# Altium PCB NODEMCU_DEVKIT_V1.0.PcbDoc
Units mm, origin at the board's own origin, x right, y up, seen from the top; angles counter-clockwise.
Board outline 25.4 x 48.26 mm, 2 copper layers (Top Layer, Bottom Layer); 34 components, 41 nets, 160 pads, 243 vias.
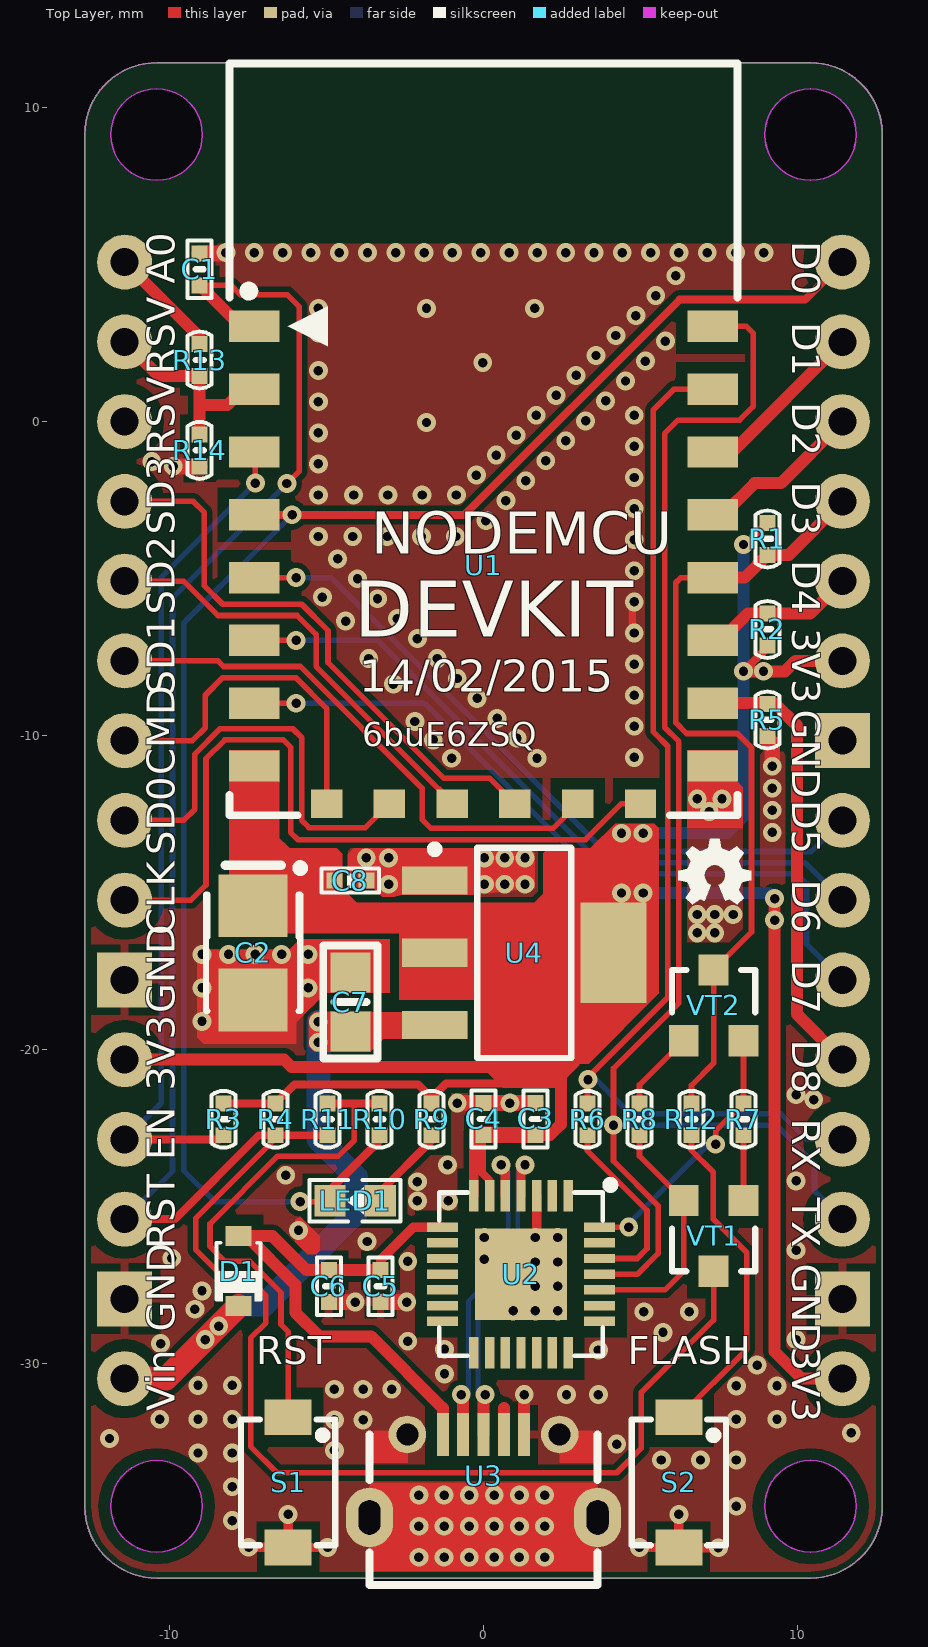
[diagram p0: Top Layer view]
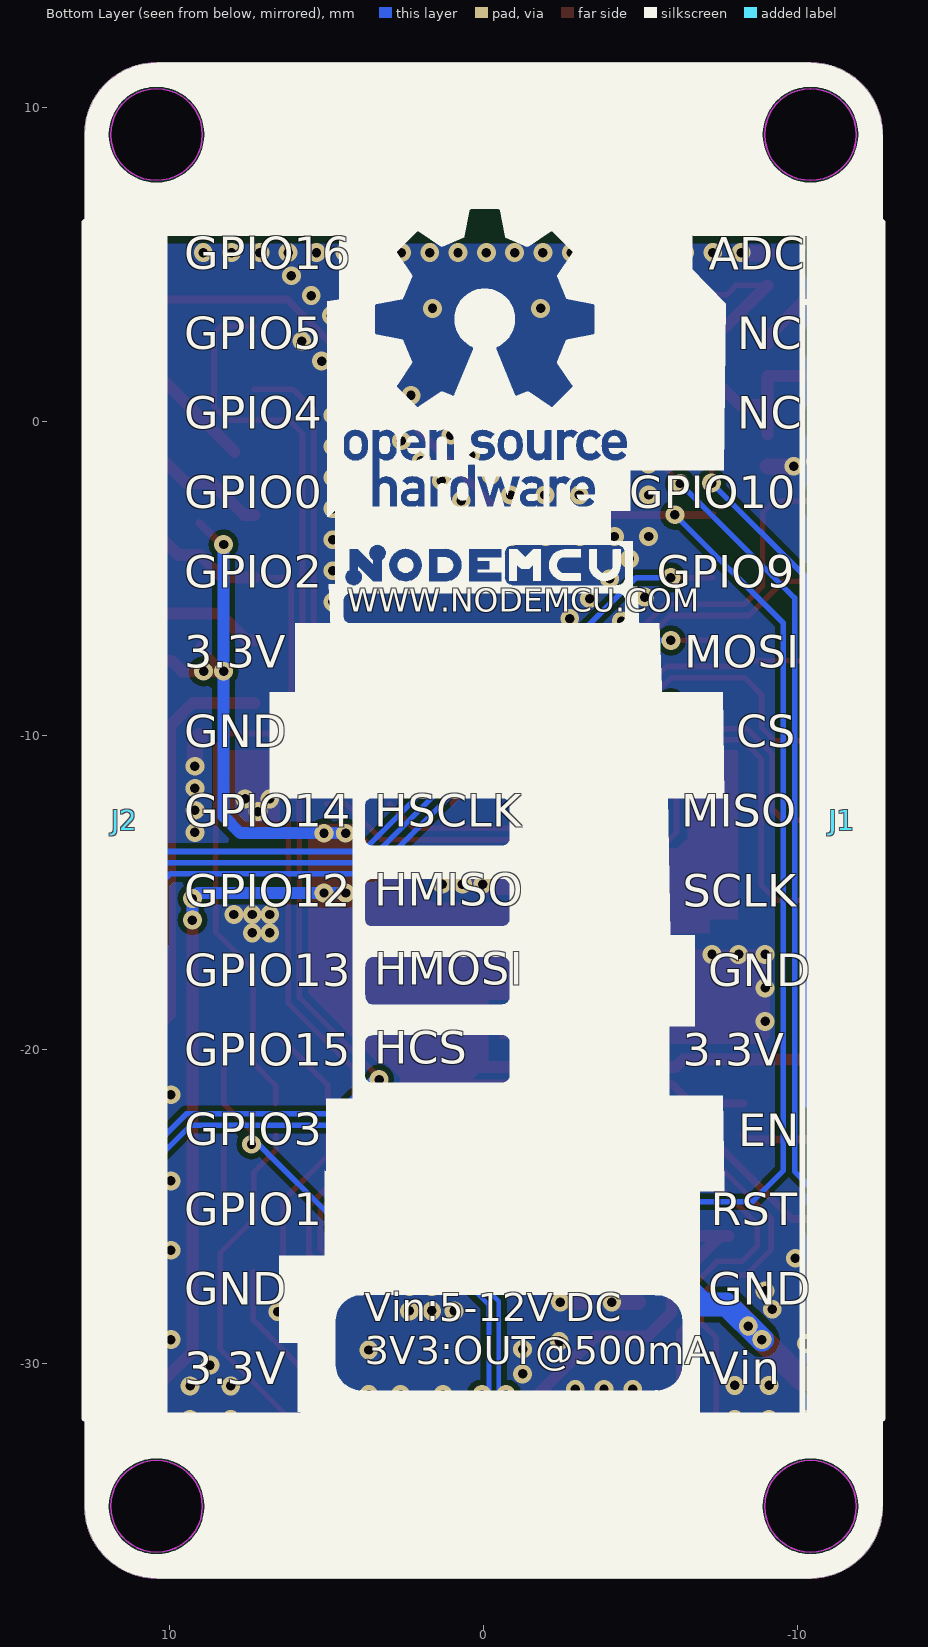
[diagram p1: Bottom Layer view, seen from below]

## Layer stack, top to bottom
Top Solder: solder mask 0.0102, Solder Resist, Dk 3.5
Top Layer: signal copper 0.0356
Dielectric 1: dielectric 0.32, FR-4, Dk 4.8
Bottom Layer: signal copper 0.0356
Bottom Solder: solder mask 0.0102, Solder Resist, Dk 3.5

## Board outline
-12.7,-34.544 -12.7,9.144 cw(c-10.414,9.144) -10.414,11.43 10.414,11.43 cw(c10.414,9.144) 12.7,9.144 12.7,-34.544 cw(c10.414,-34.544) 10.414,-36.83 -10.414,-36.83 cw(c-10.414,-34.544)

## Design rules (kind name [scope] priority, off if disabled: settings)
Clearance Clearance_Polygon [InNamedPolygon('Bottom Layer-GND') Or InNamedPolygon('Top Layer-GND') vs IsPad] p1: gap=0.381 ignorepadtopadclearanceinfootprint=FALSE except(0: Arc-Hole Track-Hole SMDPad-Hole THPad-Hole Via-Hole Fill-Hole Poly-Hole Region-Hole Text-Hole)
Clearance Clearance_Diff [InNet('D_N') vs InNet('D_P')] p2: gap=0.152 ignorepadtopadclearanceinfootprint=FALSE except(0: Arc-Hole Track-Hole SMDPad-Hole THPad-Hole Via-Hole Fill-Hole Poly-Hole Region-Hole Text-Hole)
Clearance [All] p3: gap=0.178 ignorepadtopadclearanceinfootprint=FALSE except(0: Arc-Hole Track-Hole SMDPad-Hole THPad-Hole Via-Hole Fill-Hole Poly-Hole Region-Hole Text-Hole)
DiffPairsRouting [All] p1: maxlimit=0.254 minlimit=0.152 mostfreqgap=0.152 toplayer_minwidth=0.152 toplayer_maxwidth=2.54 toplayer_prefwidth=0.152 bottomlayer_minwidth=0.152 bottomlayer_maxwidth=2.54 bottomlayer_prefwidth=0.152 maxuncoupledlength=12.7
HoleSize [All] p1: absolutevalues=TRUE maxlimit=5 minlimit=0.3 maxpercent=80.000 minpercent=20.000
PolygonConnect PolygonConnect_USB [InComponent('U3')And IsPadHoleValid] p1: connectstyle=Direct reliefconductorwidth=0.254 reliefentries=4 polygonreliefangle="90 Angle" airgapwidth=0.254
PolygonConnect PolygonConnect_Via [IsVia] p2: connectstyle=Direct reliefconductorwidth=0.254 reliefentries=4 polygonreliefangle="90 Angle" airgapwidth=0.254
PolygonConnect [All] p3: connectstyle=Relief reliefconductorwidth=0.254 reliefentries=4 polygonreliefangle="90 Angle" airgapwidth=0.254
RoutingVias [All] p1: holewidth=0.711 width=1.27 viastyle="Through Hole" minholewidth=0.711 minwidth=1.27 maxholewidth=0.711 maxwidth=1.27
SilkToBoardRegionClearance [All] p1 off:
SilkToSilkClearance [All] p1 off: silktosilkclearance=0.254
SilkToSolderMaskClearance [IsPad] p1 off: minsilkscreentomaskgap=0.254 clearancetoexposedcopper=TRUE
SolderMaskExpansion [All] p1: expansion=0.102
Width [All] p1: maxlimit=7.62 minlimit=0.178 preferedwidth=0.254
25 further rules are at their usual default settings.

## Classes and differential pairs
component class 03_USB_TO_UART: C3 C4 C5 C6 R6 R7 R8 U2 U3 VT1 VT2
component class 02_ESP12_CORE: C1 C2 R1 R2 R3 R4 R5 U1
component class 04_POWER: C7 C8 D1 U4
component class 05_IO_CONN: J1 J2
component class 06_KEY: LED1 R9 R10 R11 R12 S1 S2
component class 07_ADC: R13 R14
differential pair D: +D_P -D_N

## Components (designator, comment, footprint, x,y, rotation, side; value= is the part's Value field where it differs from the comment)
C1 "100nF" SMT_C_0402 -9.042,4.851 r90 top
C2 "100uF TAJB107M006RNJ" SMT_C_Tantalum_B -7.341,-16.916 r270 top
C3 "10uF" SMT_C_0402 1.656,-22.209 r90 top
C4 "100nF" SMT_C_0402 0,-22.209 r90 top
C5 "10uF" SMT_C_0402 -3.282,-27.534 r270 top
C6 "100nF" SMT_C_0402 -4.923,-27.534 r270 top
C7 "10uF 25V" SMT_C_0805 -4.242,-18.486 r90 top
C8 "10uF" SMT_C_0402 -4.242,-14.616 r0 top
D1 "1N5819/SS14/S4(SOD_323)" SMT_DIODE_SOD_323 -7.798,-27.051 r270 top
J1 "THT_Male_P_1x15" THT_Male_P_1x15-2.54mm#1 -11.43,5.08 r180 bottom locked
J2 "THT_Male_P_1x15" THT_Male_P_1x15-2.54mm#2 11.43,5.08 r180 bottom locked
LED1 "BLUE" SMT_LED_0603 -4.089,-24.816 r180 top
R1 "12k" SMT_R_0402 9.042,-3.734 r270 top
R2 "12k" SMT_R_0402 9.042,-6.617 r90 top
R3 "12k" SMT_R_0402 -8.279,-22.219 r270 top
R4 "12k" SMT_R_0402 -6.623,-22.219 r270 top
R5 "12k" SMT_R_0402 9.042,-9.5 r90 top
R6 "470" SMT_R_0402 3.311,-22.219 r90 top
R7 "12k" SMT_R_0402 8.279,-22.219 r90 top
R8 "12k" SMT_R_0402 4.967,-22.219 r270 top
R9 "470" SMT_R_0402 -1.656,-22.219 r90 top
R10 "0(NC)" SMT_R_0402 -3.311,-22.219 r270 top
R11 "470" SMT_R_0402 -4.967,-22.219 r270 top
R12 "470" SMT_R_0402 6.623,-22.219 r90 top
R13 "220k(1%)" SMT_R_0402 -9.042,1.964 r90 top
R14 "100k(1%)" SMT_R_0402 -9.042,-0.914 r90 top
S1 "KEY_RST/USER" SMT_SW_PTS_820 -6.223,-33.782 r270 top locked
S2 "KEY_FLASH" SMT_SW_PTS_820 6.223,-33.782 r270 top locked
U1 "ESP_12_E" ESP_12_E_L -8,3.033 r0 top locked
U2 "CP2102" CP2102 1.194,-27.153 r270 top locked
U3 "USB_Micro_5S_B" USB_MICRO_5S_B 0,-32.258 r180 top locked
U4 "NCP1117ST33T3G" SOT-223 1.295,-16.916 r180 top
VT1 "S8050" SMT_TRIODE_NPN 7.329,-25.93 r180 top
VT2 "S8050" SMT_TRIODE_NPN 7.329,-18.588 r0 top

## Footprints (in the part's own frame and the unit in brackets; to place one, negate y for a bottom-side part, rotate by r counter-clockwise, add the part's x,y. Pads: shape width x height; smd on the part's side, far side on the other; paste and mask are expansions set on the pad)
CP2102 [mm] "CP2102"
  rect 1x0.3 smd: 1(-2.5,1.5) 2(-2.5,1) 3(-2.5,0.5) 4(-2.5,0) 5(-2.5,-0.5) 6(-2.5,-1) 7(-2.5,-1.5) 15(2.5,-1.5) 16(2.5,-1) 17(2.5,-0.5) 18(2.5,0) 19(2.5,0.5) 20(2.5,1) 21(2.5,1.5)
  rect 0.3x1 smd: 8(-1.5,-2.5) 9(-1,-2.5) 10(-0.5,-2.5) 11(0,-2.5) 12(0.5,-2.5) 13(1,-2.5) 14(1.5,-2.5) 22(1.5,2.5) 23(1,2.5) 24(0.5,2.5) 25(0,2.5) 26(-0.5,2.5) 27(-1,2.5) 28(-1.5,2.5)
  rect 2.921x2.921 smd paste-3.2: 29(0,0)
  silkscreen extent -2.97,-2.6 2.6,2.97, body extent -2.5,-2.5 2.5,2.5, height 1
ESP_12_E_L [mm] "ESP-12 Wi-Fi Module by AI-Thinker"
  rect 1.6x1 smd: 1(0.7,0) 2(0.7,-2) 3(0.7,-4) 4(0.7,-6) 5(0.7,-8) 6(0.7,-10) 7(0.7,-12) 8(0.7,-14) 15(15.3,-14) 16(15.3,-12) 17(15.3,-10) 18(15.3,-8) 19(15.3,-6) 20(15.3,-4) 21(15.3,-2) 22(15.3,0)
  rect 1x0.9 smd: 9(3,-15.2) 10(5,-15.2) 11(7,-15.2) 12(9,-15.2) 13(11,-15.2) 14(13,-15.2)
  silkscreen extent -0.08,-15.57 16.08,8.37, body extent 0,-15.49 16,8.51, height 2.75
SMT_C_0402 [mil] "Surface mount capacitor 0402"
  rect 20x20 smd: 1(-20,0) 2(20,0)
  silkscreen extent -36,-15 36,15, body extent -20,-10 20,10, height 20
SMT_C_0805 [mil] "Surface mount capacitor 0805"
  rect 50x50 smd: 1(-37,0) 2(37,0)
  silkscreen extent -71,-34 71,34, body extent -49,-24 49,25, height 31
SMT_C_Tantalum_B [mm] "Capacitor, SM Tantalum; Body 3.5 x 2.8 mm (LxW typ)"
  rect 2x2.2 smd: 1(-1.5,0) 2(1.5,0)
  silkscreen extent -2.82,-1.5 1.85,1.63, body extent -1.75,-1.4 1.75,1.4, height 1.9
SMT_DIODE_SOD_323 [mm] "SOD-323(0805) Package"
  rect 0.63x0.83 smd: 1(-1.115,0) 2(1.115,0)
  silkscreen extent -0.9,-0.7 0.96,0.7, body extent -1.35,-0.62 1.35,0.62, height 1.1
SMT_LED_0603 [mm] "SMT LED"
  rect 1x1 smd: 1(-0.8,0) 2(0.8,0)
  silkscreen extent -1.45,-0.66 1.45,0.66, body extent -0.81,-0.4 0.81,0.4, height 0.6
SMT_R_0402 [mil] "Surface mount resistor 0402"
  rect 20x20 smd: 1(-20,0) 2(20,0)
  silkscreen extent -36,-15 36,15, body extent -20,-10 20,10, height 20
SMT_SW_PTS_820 [mm] "SMT Tactile ?Switch PTS 820 Series"
  rect 1.143x1.5 smd: 1(-2.075,0) 2(2.075,0)
  round 0 all layers, no hole paste-2.54 mask-2.54: MH1(0,0.9) MH2(0,-0.9)
  silkscreen extent -2,-1.5 2,1.5, body extent -2.25,-1.55 2.25,1.55, height 2.05
SMT_TRIODE_NPN [mm] "Surface mount NPN transistor, package SOT-23"
  rect 0.95x1 smd: 1(-0.95,-1.125) 2(0.95,-1.125) 3(0,1.125)
  silkscreen extent -1.33,-0.22 1.32,1.13, body extent -1.45,-1.4 1.45,1.4, height 1.3
SOT-223 [mm] "3 LEAD SOT-223 PLASTIC PACKAGE"
  rect 2.1x0.9 smd: 1(2.85,-2.3) 2(2.85,0) 3(2.85,2.3)
  rect 2.1x3.2 smd: 2(-2.85,0)
  silkscreen extent -1.5,-3.42 2.97,3.35, body extent -3.54,-3.25 3.54,3.25, height 1.65
THT_Male_P_1x15-2.54mm#1 [mil] "THT Male pin header strip 1x15 2.54mm pitch"
  round 69 hole 35: 1(0,0) 2(0,-100) 3(0,-200) 4(0,-300) 5(0,-400) 6(0,-500) 7(0,-600) 8(0,-700) 9(0,-800) 11(0,-1000) 12(0,-1100) 13(0,-1200) 15(0,-1400)
  rect 69x69 hole 35: 10(0,-900) 14(0,-1300)
  silkscreen extent -50,-1450 50,50, body extent -57,-1450 57,50, height 335
THT_Male_P_1x15-2.54mm#2 [mil] "THT Male pin header strip 1x15 2.54mm pitch"
  round 69 hole 35: 1(0,0) 2(0,-100) 3(0,-200) 4(0,-300) 5(0,-400) 6(0,-500) 8(0,-700) 9(0,-800) 10(0,-900) 11(0,-1000) 12(0,-1100) 13(0,-1200) 15(0,-1400)
  rect 69x69 hole 35: 7(0,-600) 14(0,-1300)
  silkscreen extent -50,-1450 50,50, body extent -57,-1450 57,50, height 335
USB_MICRO_5S_B [mil] "USB Micro SMT 5S B"
  rect 15x54 smd: 1(51,0) 2(25.5,0) 3(0,0) 4(-25.5,0) 5(-51,0)
  oval 59.06x74.8 hole 27.56 slot 43.31 at 90 deg: 6(-143,104) 7(143,104)
  round 47.24 hole 27.5: 8(95.5,0) 9(-95.5,0)
  silkscreen extent -143,0 143,189, body extent -161,-9 161,204, height 105

## Part data
C1 C3 C4 C5 C6 C8: library part SMT_C_0402, "Surface mount capacitor 0402"
C2: library part SMT_C_Tantalum_B, "Capacitor, SM Tantalum; Body 3.5 x 2.8 mm (LxW typ)"
C7: library part SMT_C_0805, "Surface mount capacitor 0805"
D1: library part SMT_DIODE_SCHOTTKY_SOD_323, "Surface mount schottky diode SOD-323(0805) Package"
J1 J2: "THT Male pin header strip 1x15"
LED1: library part SMT_LED_0603, "SMT LED"
R1 R2 R3 R4 R5 R6 R7 R8 R9 R10 R11 R12 R13 R14: library part SMT_R_0402, "Surface mount resistor 0402"
S1 S2: library part SMT_SW_PTS_820, "SMT Tactile ?Switch PTS 820 Series"
U1: "ESP-12 Wi-Fi Module by AI-Thinker"
U3: "USB micro female SMT with 4 fixed foot"
U4: library part NCP1117, "NCP1117, NCV1117. 1.0 A Low-Dropout Positive  Fixed and Adjustable  Voltage Regulators"
VT1 VT2: library part SMT_TRIODE_NPN, "Surface mount NPN transistor, package SOT-23"

## Free pads (board coordinates)
  round 2.921 hole 2.921 unplated paste-7.62 mask-7.62: 0(-10.414,-34.544) 0(-10.414,9.144) 0(10.414,-34.544) 0(10.414,9.144)

## Via types
v1: diameter 0.6, hole 0.3, Top Layer to Bottom Layer, tented both sides, 243 vias

## Nets (pads, with @x,y where several pads share a name; then routed paths per layer and width w, separated by ;. In a path a pad name is that pad's centre, name@x,y a point inside that pad or via, vN(x,y) a via of type N, cw(c..) or ccw(c..) an arc to the next point about the centre after c; other vN are vias at no path point)
ACTIVE: U2.11
ADC: J1.2 R13.1 R14.2 U1.2 | length 6.6
  Top Layer w0.381: J1.2 -10.346,1.456 R13.1 R14.2 ; -8.966,0.525 -8.162,0.525 -7.653,1.033 U1.2
ADC_EX: J1.1 R13.2 | length 3.6
  Top Layer w0.381: J1.1 -9.042,2.692 R13.2
CTS: U2.23
D_N: U2.5 U3.2 | length 10.4
  Top Layer w0.152: v1(0.559,-23.673) v1@0.694,-23.808
  Top Layer w0.3: U2.5 v1@0.694,-23.808
  Top Layer w0.381: U3.2 v1@-0.648,-31.051
  Bottom Layer w0.152: v1(-0.711,-30.988) -0.483,-30.988 -0.483,-28.017 0.787,-26.747 0.787,-23.901 v1(0.559,-23.673)
D_P: U2.4 U3.3 | length 10.4
  Top Layer w0.152: v1@1.194,-23.8 v1(1.321,-23.673)
  Top Layer w0.3: U2.4 v1@1.194,-23.8
  Top Layer w0.381: U3.3 v1@0,-31.039
  Bottom Layer w0.152: v1(0.051,-30.988) -0.178,-30.988 -0.178,-28.143 1.092,-26.873 1.092,-23.901 v1(1.321,-23.673)
DCD: U2.1
DSR: U2.27
DTR: R7.2 U2.28 VT2.2 | length 8.5
  Top Layer w0.178: U2.28 v1@4.623,-25.653 ; v1(7.391,-23.012) 7.391,-22.598 R7.2 VT2.2
  Bottom Layer w0.178: v1(4.623,-25.654) 4.623,-25.552 7.163,-23.012 v1(7.391,-23.012)
EN: J1.12 R3.2 U1.3 | length 26.8
  Top Layer w0.178: v1(-7.264,-1.956) U1.3@-7.264,-1.002
  Top Layer w0.254: J1.12 -8.412,-22.86 R3.2
  Bottom Layer w0.178: J1.12 -10.262,-21.692 -10.262,-4.953 v1(-7.264,-1.956)
GND: C1.2 C2.2 C3.2 C4.2 C5.2 C6.2 C7.2 C8.2 J1.10 J1.14 J2.7 J2.14 R5.1 R14.1 S1.2 S2.2 U1.15 U2.3 U2.29 U3.5 U3.6 U3.7 U3.8 U3.9 U4.1 | length 21.5
  Top Layer w0.3: v1(-7.481,-35.849) S1.2@-6.223,-35.849 ; v1(-6.223,-34.802) S1.2 v1(-4.965,-35.857) ; U2.29@1.694,-26.653 U2.3 ; v1(4.965,-35.857) S2.2 v1(6.223,-34.802) ; S2.2@6.223,-35.865 v1(7.481,-35.865) ; v1(6.807,-12.014) U1.15@6.807,-10.998 ; v1(7.188,-12.421) 7.188,-11.078 U1.15 ; v1(7.595,-12.014) U1.15@7.595,-10.998
  Top Layer w0.381: U3.5 v1(1.295,-30.988)
  Top Layer w0.508: v1(-9.881,-1.422) R14.1 ; C1.2 v1@-8.204,5.359 ; C6.2 v1(-4.084,-28.042) ; C8.2 v1(-3.734,-13.894) ; C5.2 v1(-2.443,-28.042) ; v1(-0.838,-21.701) C4.2 C3.2 ; R5.1 9.042,-10.109 9.195,-10.262 v1(9.195,-10.973)
  other v1: -2.057,-36.17 -1.257,-36.17 -0.457,-36.17 0.343,-36.17 1.143,-36.17 1.943,-36.17 -2.057,-35.179 -1.257,-35.179 -0.457,-35.179 0.343,-35.179 1.143,-35.179 1.943,-35.179 -8.001,-35.001 8.052,-34.544 -2.057,-34.188 -1.257,-34.188 -0.457,-34.188 0.343,-34.188 1.143,-34.188 1.943,-34.188 -8.001,-33.924 5.664,-33.071 6.909,-33.071 8.052,-33.071 -9.093,-32.847 -8.001,-32.847 -4.75,-32.766 4.242,-32.563 -11.913,-32.385 11.709,-32.207 -4.75,-31.792 -3.835,-31.792 -10.312,-31.77 -9.093,-31.77 -8.001,-31.77 8.052,-31.77 9.347,-31.77 2.642,-30.988 3.658,-30.988 -4.75,-30.819 -3.835,-30.819 -2.921,-30.819 8.052,-30.709 9.347,-30.709 -9.093,-30.693 -8.001,-30.693 -1.245,-30.328 8.712,-30.048 3.658,-29.566 -1.245,-29.54 -10.287,-29.362 -2.413,-29.286 9.957,-29.235 5.715,-29.007 5.105,-28.346 6.553,-28.346 0.94,-28.321 1.651,-28.321 2.362,-28.321 -9.195,-28.27 -8.966,-27.686 1.651,-27.542 2.362,-27.542 -2.413,-26.746 1.651,-26.763 2.362,-26.763 0.025,-26.67 -9.931,-26.645 9.957,-26.391 -3.708,-26.111 0.025,-25.984 1.651,-25.984 2.362,-25.984 -5.893,-25.756 -2.108,-24.816 -1.118,-24.816 -2.108,-24.206 9.957,-24.181 -6.299,-24.003 -1.143,-23.673 0.838,-21.701 10.516,-21.59 9.957,-21.438 -8.966,-19.101 -8.966,-18.034 -5.588,-18.034 -8.966,-16.967 -8.122,-16.967 -7.277,-16.967 -6.433,-16.967 -5.588,-16.967 6.807,-16.281 7.366,-16.281 6.807,-15.697 7.366,-15.697 7.95,-15.697 -3.023,-14.732 0.025,-14.732 0.673,-14.732 1.321,-14.732 -3.023,-13.894 0.025,-13.894 0.673,-13.894 1.321,-13.894 9.195,-13.081 9.195,-12.378 9.195,-11.676 -1.016,-10.719 1.702,-10.719 4.801,-10.693 -1.6,-10.135 1.067,-10.084 4.801,-9.703 -2.184,-9.55 0.432,-9.449 -0.203,-8.814 4.801,-8.712 -2.87,-8.357 -0.838,-8.179 4.801,-7.722 -3.658,-7.544 -1.473,-7.544 -2.108,-6.909 4.801,-6.731 -4.394,-6.35 -2.743,-6.274 4.801,-5.74 -3.378,-5.639 -5.131,-5.588 -4.013,-5.004 4.801,-4.75 -4.648,-4.369 4.801,-3.759 -5.258,-3.658 -4.166,-3.658 -3.073,-3.658 -1.981,-3.658 -0.889,-3.658 0.076,-3.15 4.801,-2.769 0.711,-2.515 -5.258,-2.337 -4.14,-2.337 -3.048,-2.337 -1.956,-2.337 -0.864,-2.337 1.346,-1.88 4.801,-1.778 -0.229,-1.702 -5.258,-1.346 -10.566,-1.27 1.981,-1.245 0.406,-1.067 4.801,-0.787 2.616,-0.61 1.041,-0.432 -5.258,-0.356 -1.816,-0.025 3.251,0.025 1.676,0.203 4.801,0.203 -5.258,0.635 3.886,0.66 2.311,0.838 4.521,1.295 2.946,1.473 -5.258,1.626 -0.025,1.88 5.156,1.93 3.581,2.108 5.791,2.565 4.216,2.743 -5.258,2.819 4.851,3.378 -5.258,3.607 -1.816,3.607 1.626,3.607 5.486,4.013 6.121,4.648 -8.204,5.385 -7.302,5.385 -6.401,5.385 -5.499,5.385 -4.597,5.385 -3.696,5.385 -2.794,5.385 -1.892,5.385 -0.991,5.385 -0.089,5.385 0.813,5.385 1.714,5.385 2.616,5.385 3.518,5.385 4.42,5.385 5.321,5.385 6.223,5.385 7.125,5.385 8.026,5.385 8.928,5.385
GPIO0: J2.4 R1.2 R12.2 U1.18 VT2.3 | length 25.7
  Top Layer w0.178: R12.2 6.623,-21.139 7.329,-20.434 VT2.3 8.534,-16.258 8.534,-10.385 8.081,-9.931 6.467,-9.931 6.121,-9.586 6.121,-5.131 6.286,-4.967 U1.18
  Top Layer w0.381: U1.18 8.318,-4.967 R1.2 9.728,-4.242 J2.4
GPIO2: J2.5 R2.2 U1.17 | length 4.9
  Top Layer w0.381: U1.17 7.562,-6.967 8.42,-6.109 R2.2 10.401,-6.109 J2.5
GPIO4: J2.3 U1.19 | length 5.4
  Top Layer w0.381: U1.19 7.625,-2.967 8.636,-1.956 9.474,-1.956 J2.3
GPIO5: J2.2 U1.20 | length 5
  Top Layer w0.381: U1.20@7.923,-0.967 J2.2
GPIO9: J1.5 U1.11 | length 14
  Top Layer w0.178: J1.5 -9.55,-5.08 -8.458,-6.172 -5.938,-6.172 -5.334,-6.777 -5.334,-7.793 -1.417,-11.709 -1.397,-11.709 -1,-12.106 U1.11
GPIO10: J1.4 U1.12 | length 18.4
  Top Layer w0.178: J1.4 -9.246,-2.54 -8.89,-2.896 -8.89,-5.232 -8.306,-5.817 -5.791,-5.817 -4.953,-6.655 -4.953,-7.671 -1.27,-11.354 0.187,-11.354 U1.12
GPIO12: J2.9 U1.6 | length 22.2
  Top Layer w0.178: U1.6 v1(-5.969,-6.967)
  Bottom Layer w0.178: v1(-5.969,-6.967) -3.366,-6.967 3.714,-14.046 10.236,-14.046 J2.9
GPIO13: J2.10 U1.7 | length 23.5
  Top Layer w0.178: U1.7 v1(-5.969,-8.967)
  Bottom Layer w0.178: v1(-5.969,-8.967) -1.879,-8.967 3.556,-14.402 9.982,-14.402 10.287,-14.707 10.287,-16.637 J2.10
GPIO14: J2.8 U1.5 | length 22.8
  Top Layer w0.178: U1.5 v1(-5.969,-4.967)
  Bottom Layer w0.178: v1(-5.969,-4.967) -4.863,-4.967 3.861,-13.691 10.439,-13.691 J2.8
GPIO15: J2.11 R5.2 U1.16 | length 14.2
  Top Layer w0.381: U1.16 9.271,-8.967 9.982,-9.677 9.982,-18.872 J2.11
GPIO16: J2.1 LED1.2 R10.2 U1.4 | length 52.2
  Top Layer w0.178: v1(-5.842,-24.841) LED1.2@-4.915,-24.841
  Top Layer w0.254: U1.4 v1(-6.096,-2.967) -0.604,-2.967 6.248,3.886 10.236,3.886 J2.1 ; LED1.2 -4.889,-24.473 -3.311,-22.895 R10.2
  Bottom Layer w0.178: v1(-6.096,-2.967) -9.55,-6.421 -9.55,-23.851 -8.56,-24.841 v1(-5.842,-24.841)
NetLED1_1: LED1.1 R9.1 | length 2.8
  Top Layer w0.254: LED1.1 -3.289,-24.524 -1.656,-22.89 R9.1
NetR6_1: R6.1 U2.26 | length 6
  Top Layer w0.178: R6.1 3.311,-23.225 5.207,-25.121 5.207,-26.34 4.894,-26.653 U2.26
NetR7_1: R7.1 VT1.1 | length 2.1
  Top Layer w0.178: VT1.1 R7.1
NetR8_1: R8.1 VT2.1 | length 2.6
  Top Layer w0.178: R8.1 4.967,-21.125 VT2.1
NetR10_1: R10.1 R11.1 S1.1 | length 16.2
  Top Layer w0.178: S1.1 -6.223,-28.981 -6.452,-28.753 -6.452,-27.737 -7.442,-26.746 -8.23,-26.746 -8.712,-26.264 -8.712,-25.547 -6.558,-23.393 -4.623,-23.393 -4.115,-22.885 -4.115,-21.711
  Top Layer w0.254: R11.1 R10.1@-3.302,-21.711
NetR12_1: R12.1 S2.1 | length 10.6
  Top Layer w0.178: S2.1 8.382,-29.548 8.382,-26.467 7.315,-25.4 7.315,-23.901 6.623,-23.209 R12.1
NRST: C1.1 J1.13 R4.2 R11.2 U1.1 VT1.3 | length 76.9
  Top Layer w0.178: C1.1 -8.052,4.343 -7.747,4.039 -6.248,4.039 -5.867,3.658 -5.867,-1.575 v1(-6.261,-1.968) ; R4.2 -6.623,-22.828 -9.169,-25.375 -9.169,-26.365 -8.357,-27.178 -7.595,-27.178 -6.934,-27.838 -6.934,-28.702 -7.417,-29.185 -7.417,-32.639 -6.579,-33.477 4.242,-33.477 5.029,-32.69 5.029,-30.912 7.329,-28.612 VT1.3
  Top Layer w0.254: J1.13 -9.83,-25.4 -7.157,-22.727 R4.2 R11.2
  Top Layer w0.381: C1.1 -7.732,3.033 U1.1
  Bottom Layer w0.178: J1.13 -9.906,-23.876 -9.906,-5.613 v1(-6.261,-1.968)
OTG_ID: U3.4 | length 0.8
  Top Layer w0.381: U3.4 0.648,-31.42
RI: U2.2
RTS: R8.2 U2.24 VT1.2 | length 7.8
  Top Layer w0.178: U2.24 5.774,-27.653 6.379,-27.048 VT1.2 4.967,-23.394 R8.2
RXD0: J2.12 R6.2 U1.21 | length 34.4
  Top Layer w0.178: R6.2 3.311,-20.895 5.867,-18.339 5.867,-10.338 5.41,-9.881 5.41,0.381 6.063,1.033 U1.21
  Bottom Layer w0.178: v1(3.327,-20.955) 3.581,-20.955 4.674,-22.047 9.469,-22.047 10.282,-22.86 J2.12
SPI_CLK: J1.9 U1.14 | length 24.3
  Top Layer w0.178: J1.9 -9.322,-15.24 -8.839,-14.757 -8.839,-10.734 -8.24,-10.135 -6.375,-10.135 -6.147,-10.363 -6.147,-13.081 -5.918,-13.31 3.251,-13.31 4.394,-12.167 U1.14
SPI_INT: J1.6 U1.13 | length 17.6
  Top Layer w0.178: J1.6 -8.458,-7.62 -8.28,-7.798 -5.833,-7.798 -1.956,-11.675 -1.956,-12.675 -1.676,-12.954 2.213,-12.954 U1.13
SPI_MISO: J1.8 U1.10 | length 13.8
  Top Layer w0.178: J1.8 -9.55,-12.7 -9.195,-12.344 -9.195,-10.587 -8.387,-9.779 -6.076,-9.779 -5.791,-10.064 -5.791,-12.703 -5.565,-12.929 -3.762,-12.929 U1.10
SPI_MOSI: J1.7 U1.9 | length 11.3
  Top Layer w0.178: J1.7 -9.271,-10.16 -8.865,-9.754 -8.865,-8.712 -8.306,-8.153 -5.981,-8.153 -5,-9.134 U1.9
TXD0: J2.13 U1.22 U2.25 | length 45.8
  Top Layer w0.178: U2.25 4.902,-27.153 5.563,-26.492 5.563,-24.973 4.14,-23.551 4.14,-20.6 6.223,-18.517 6.223,-10.191 5.766,-9.733 5.766,-0.381 6.198,0.051 8.153,0.051 8.585,0.483 8.585,2.819 8.371,3.033 U1.22
  Bottom Layer w0.178: v1(4.14,-22.403) 9.322,-22.403 10.541,-23.622 10.541,-24.511 J2.13
VDD3V3: C2.1 C3.1 C4.1 C8.1 J1.11 J2.6 J2.15 R1.1 R2.1 R3.1 R4.1 R9.2 U1.8 U2.6 U2.7 U4.2 | length 90.3
  Top Layer w0.254: R3.1 R4.1 -6.02,-21.107 -2.083,-21.107 -1.656,-21.534 R9.2 -1.656,-21.544 -1.194,-21.082 1.016,-21.082 1.905,-20.193 1.905,-17.653 ; C4.1@-0.046,-22.717 -0.046,-23.923 0.194,-24.163 U2.6 ; v1(8.28,-7.95) 9.042,-7.188 R2.1 ; v1(8.28,-3.912) 8.357,-3.912 R1.1
  Top Layer w0.3: U2.7 -0.306,-22.709
  Top Layer w0.381: J1.11 -6.35,-20.32 -6.121,-20.549 0.787,-20.549 1.372,-19.964 1.372,-17.501 ; C3.1 2.124,-22.717 2.464,-22.377 2.464,-15.037 v1(4.394,-13.106) v1(5.08,-13.106) ; 2.997,-15.57 2.997,-15.291 3.277,-15.011 v1(4.394,-15.011) v1(5.08,-15.011) ; v1(8.28,-7.95) v1(8.915,-7.95) 9.601,-7.95 9.931,-7.62 J2.6 ; v1(9.271,-15.189) v1(9.271,-15.875) 9.271,-29.616 10.135,-30.48 J2.15
  Top Layer w0.508: C4.1 C3.1
  Bottom Layer w0.381: v1(4.394,-15.011) v1(5.08,-15.011) 9.093,-15.011 v1(9.271,-15.189) v1(9.271,-15.875) ; v1(4.394,-13.106) v1(5.08,-13.106) 7.747,-13.106 8.28,-12.573 v1(8.28,-7.95) v1(8.28,-3.912)
VDD5V: C7.1 D1.2 J1.15 U4.3 | length 17.6
  Top Layer w0.762: J1.15 -10.112,-30.48 D1.2
  Bottom Layer w0.762: v1(-8.865,-29.235) -7.744,-28.115 -6.982,-28.115 -4.064,-25.197 -4.064,-24.054 -5.263,-22.855 v1(-5.263,-19.766) v1(-5.263,-19.116)
  other v1: -8.433,-28.804
VDDUSB: C5.1 C6.1 D1.1 U2.8 U3.1 | length 17.8
  Top Layer w0.3: C5.1 -3.282,-26.7 -2.234,-25.653 U2.8
  Top Layer w0.381: C5.1 C6.1 -5.639,-27.026 -6.728,-25.936 D1.1 -7.541,-25.936 -5.994,-27.483 -5.994,-28.372 -5.232,-29.134 -3.581,-29.134 -1.295,-31.42 U3.1
pads on no net: J1.3 S1.MH1 S1.MH2 S2.MH1 S2.MH2 U2.9 U2.10 U2.12 U2.13 U2.14 U2.15 U2.16 U2.17 U2.18 U2.19 U2.20 U2.21 U2.22

## Polygon pours and split planes (outlines as drawn)
GND on Bottom Layer "Bottom Layer-GND" (solid, remove dead copper, pour order 4): -12.7,5.664 -12.7,-36.83 12.7,-36.83 12.7,5.664
GND on Top Layer "Top Layer-GND" (solid, remove dead copper, pour order 3): -12.7,5.664 -12.7,-36.83 12.7,-36.83 12.7,5.664

## Keep-outs
Keep-Out Layer:
  circle w0.051: c-10.414,-34.544 r1.46
  circle w0.051: c10.414,-34.544 r1.46
  circle w0.051: c10.414,9.144 r1.46
  circle w0.051: c-10.414,9.144 r1.46
  lines w0.051: 6.858,11.43 10.414,11.43 ; 10.414,11.43 cw(c10.414,9.144) 12.7,9.144 12.7,-34.544 cw(c10.414,-34.544) 10.414,-36.83 -10.414,-36.83 cw(c-10.414,-34.544) -12.7,-34.544 -12.7,9.144 cw(c-10.414,9.144) -10.414,11.43 10.414,11.43

## Other copper
Top Layer:
  rectangle net VDD3V3: -5.004,-15.85 -4.496,-14.351
  rectangle net VDD3V3: -7.214,-16.307 2.083,-15.316
  rectangle net VDD3V3: -2.692,-18.415 5.207,-15.418
  rectangle net VDD5V: -4.851,-19.66 -0.508,-18.796
  rectangle net VDD3V3: -8.103,-15.85 -6.502,-10.465
  rectangle net GND: 2.413,-33.172 3.505,-32.131
  rectangle net GND: -3.505,-33.172 -2.413,-32.131
  rectangle net GND: -3.632,-36.627 3.632,-33.782
  region net GND: -5.842,-25.328 -5.207,-25.963 -5.207,-26.391 -5.334,-26.518 -5.616,-26.518 -5.994,-26.139 -5.994,-25.425
  region net VDD3V3: -6.883,-13.183 -6.579,-13.183 -6.172,-13.589 -4.674,-13.589 -4.496,-13.767 -4.496,-14.859 -3.81,-15.545 -3.81,-16.154 -6.223,-16.154 -6.883,-15.494
  region net VDD3V3: 1.524,-15.418 1.905,-15.037 1.905,-13.741 2.057,-13.589 3.404,-13.589 4.191,-12.802 5.436,-12.802 5.588,-12.954 5.588,-18.212 3.353,-20.447 3.048,-20.447 3.048,-20.498 2.337,-21.209 0.61,-21.209 -0.152,-20.447 -0.152,-15.418
  region net VDD5V: -3.607,-20.066 -5.385,-20.066 -5.563,-19.888 -5.563,-18.974 -5.385,-18.796 -3.537,-18.796 -3.156,-19.615
  region net VDD3V3: -0.457,-22.86 -0.457,-22.606 -0.305,-22.454 0.305,-22.454 0.305,-22.86
  region net GND: -9.119,-16.815 -6.186,-16.815 -5.86,-16.488 -2.986,-16.488 -2.986,-18.173 -2.972,-18.186 -5.029,-18.186 -5.969,-19.126 -5.969,-19.812 -8.915,-19.812 -9.119,-19.609
  pour cut-out: -5.73,-18.904 -4.998,-18.173 -2.986,-18.173 -2.986,-16.488 -2.982,-16.485 -2.718,-16.485 -2.718,-18.771 -2.743,-18.796 -5.385,-18.796
  region net GND: -4.14,-14.859 -4.318,-14.681 -4.318,-13.77 -4.137,-13.589 1.448,-13.589 1.626,-13.767 1.626,-14.859 -0.229,-15.062 -2.591,-15.062 -2.845,-15.138 -3.226,-15.138 -3.491,-14.859
  region net GND: 6.495,-10.465 6.495,-12.954 8.262,-12.954 8.262,-11.641 8.077,-11.455 8.103,-11.43 8.103,-10.465
Multi-Layer:
  region net GND: 4.623,-5.563 4.623,-6.452 4.851,-6.452 4.851,-5.537

## Silkscreen, mask and mechanical layers (free items; w line width, h text height)
Top Overlay:
  region: 7.519,-13.295 7.522,-13.303 7.576,-13.582 7.579,-13.591 7.585,-13.593 7.818,-13.69 7.824,-13.692 7.833,-13.688 8.067,-13.529 8.076,-13.525 8.087,-13.53 8.087,-13.531 8.288,-13.731 8.293,-13.742 8.29,-13.751 8.289,-13.751 8.13,-13.986 8.126,-13.994 8.129,-14 8.225,-14.233 8.228,-14.239 8.236,-14.243 8.236,-14.242 8.515,-14.296 8.524,-14.299 8.529,-14.311 8.527,-14.311 8.529,-14.595 8.524,-14.606 8.515,-14.61 8.236,-14.663 8.228,-14.667 8.225,-14.672 8.129,-14.906 8.126,-14.912 8.13,-14.92 8.29,-15.155 8.293,-15.164 8.288,-15.175 8.287,-15.174 8.087,-15.376 8.076,-15.381 8.067,-15.377 8.068,-15.377 7.833,-15.217 7.824,-15.214 7.818,-15.216 7.711,-15.261 7.706,-15.263 7.694,-15.258 7.692,-15.252 7.495,-14.77 7.493,-14.765 7.497,-14.753 7.503,-14.751 7.504,-14.755 7.602,-14.69 7.675,-14.581 7.7,-14.453 7.675,-14.325 7.602,-14.216 7.493,-14.144 7.365,-14.118 7.237,-14.144 7.129,-14.216 7.056,-14.325 7.031,-14.453 7.056,-14.581 7.129,-14.69 7.226,-14.755 7.228,-14.751 7.233,-14.753 7.238,-14.765 7.236,-14.77 7.039,-15.252 7.037,-15.258 7.025,-15.263 7.019,-15.261 6.912,-15.216 6.907,-15.214 6.898,-15.217 6.898,-15.218 6.663,-15.377 6.655,-15.381 6.643,-15.376 6.644,-15.375 6.443,-15.175 6.438,-15.164 6.441,-15.155 6.442,-15.155 6.601,-14.92 6.604,-14.912 6.602,-14.906 6.505,-14.672 6.503,-14.667 6.494,-14.663 6.216,-14.61 6.207,-14.606 6.202,-14.595 6.204,-14.595 6.202,-14.311 6.207,-14.299 6.216,-14.296 6.494,-14.243 6.503,-14.239 6.505,-14.233 6.602,-14 6.604,-13.994 6.601,-13.986 6.441,-13.751 6.438,-13.742 6.443,-13.731 6.443,-13.732 6.643,-13.53 6.655,-13.525 6.663,-13.529 6.898,-13.688 6.907,-13.692 6.912,-13.69 7.146,-13.593 7.152,-13.591 7.155,-13.582 7.208,-13.303 7.212,-13.295 7.223,-13.29 7.223,-13.291 7.507,-13.29
  text "D0" at 9.525,5.74 h1.52 r270
  text "A0" at -9.525,4.394 h1.52 r90
  text "D1" at 9.525,3.166 h1.52 r270
  text "RSV" at -9.525,1.499 h1.52 r90
  text "D2" at 9.525,0.62 h1.52 r270
  text "RSV" at -9.525,-1.052 h1.52 r90
  text "D3" at 9.525,-1.92 h1.52 r270
  text "SD3" at -9.525,-3.603 h1.52 r90
  text "D4" at 9.525,-4.42 h1.52 r270
  text "NODEMCU" at -3.581,-4.648 h2.29
  text "SD2" at -9.525,-6.154 h1.52 r90
  text "3V3" at 9.525,-6.579 h1.52 r270
  text "DEVKIT" at -4.115,-7.442 h3.05
  text "SD1" at -9.525,-8.705 h1.52 r90
  text "14/02/2015" at -3.962,-8.941 h1.75
  text "GND" at 9.525,-9.169 h1.52 r270
  text "6buE6ZSQ" at -3.861,-10.338 h0.76
  text "CMD" at -9.525,-11.256 h1.52 r90
  text "D5" at 9.525,-12.065 h1.52 r270
  text "SD0" at -9.525,-13.807 h1.52 r90
  text "D6" at 9.525,-14.583 h1.52 r270
  text "CLK" at -9.525,-16.358 h1.52 r90
  text "D7" at 9.525,-17.151 h1.52 r270
  text "GND" at -9.525,-18.847 h1.52 r90
  text "D8" at 9.525,-19.688 h1.52 r270
  text "3V3" at -9.525,-21.311 h1.52 r90
  text "RX" at 9.525,-22.201 h1.52 r270
  text "EN" at -9.525,-23.52 h1.52 r90
  text "TX" at 9.525,-24.714 h1.52 r270
  text "RST" at -9.525,-26.365 h1.52 r90
  text "GND" at 9.525,-26.828 h1.52 r270
  text "GND" at -9.525,-28.981 h1.52 r90
  text "3V3" at 9.525,-29.464 h1.52 r270
  text "RST" at -7.239,-30.328 h1.52
  text "FLASH" at 4.597,-30.328 h1.52
  text "Vin" at -9.525,-31.521 h1.52 r90
Bottom Overlay:
  drawing of 68 lines, arcs and shapes, not listed
  text "ADC" at -7.171,4.496 h1.78
  text "GPIO16" at 9.525,4.499 h1.78
  text "GPIO5" at 9.525,1.963 h1.78
  text "NC" at -8.073,1.959 h1.78
  text "NC" at -8.073,-0.577 h1.78
  text "GPIO4" at 9.525,-0.574 h1.78
  text "GPIO10" at -4.648,-3.111 h1.78
  text "GPIO0" at 9.525,-3.111 h1.78
  text "GPIO9" at -5.521,-5.647 h1.78
  text "GPIO2" at 9.525,-5.647 h1.78
  text "WWW.NODEMCU.COM" at 4.343,-6.299 h1.24
  text "MOSI" at -6.386,-8.184 h1.78
  text "3.3V" at 9.525,-8.184 h1.78
  text "CS" at -8.054,-10.72 h1.78
  text "GND" at 9.525,-10.72 h1.78
  text "MISO" at -6.303,-13.257 h1.78
  text "HSCLK" at 3.48,-13.259 h1.78
  text "GPIO14" at 9.525,-13.257 h1.78
  text "SCLK" at -6.343,-15.794 h1.78
  text "HMISO" at 3.48,-15.773 h1.78
  text "GPIO12" at 9.525,-15.794 h1.78
  text "HMOSI" at 3.48,-18.288 h1.78
  text "GND" at -7.152,-18.33 h1.78
  text "GPIO13" at 9.525,-18.33 h1.78
  text "HCS" at 3.48,-20.803 h1.78
  text "3.3V" at -6.348,-20.867 h1.78
  text "GPIO15" at 9.525,-20.867 h1.78
  text "GPIO3" at 9.525,-23.404 h1.78
  text "EN" at -8.114,-23.421 h1.78
  text "RST" at -7.231,-25.94 h1.78
  text "GPIO1" at 9.525,-25.94 h1.78
  text "GND" at -7.152,-28.477 h1.78
  text "GND" at 9.525,-28.477 h1.78
  text "Vin:5-12V DC" at 3.785,-28.956 h1.52
  text "3V3:OUT@500mA" at 3.783,-30.328 h1.52
  text "Vin" at -7.179,-31.013 h1.78
  text "3.3V" at 9.525,-31.013 h1.78
Top Paste:
  region: 3.429,-32.207 2.489,-32.207 2.489,-33.096 3.429,-33.096
  rectangle: -3.429,-33.096 -2.489,-32.207
  rectangle: -0.792,-34.315 -0.157,-33.909
  rectangle: -1.742,-34.315 -1.107,-33.909
  rectangle: -2.692,-34.315 -2.057,-33.909
  rectangle: 2.057,-34.315 2.692,-33.909
  rectangle: 2.057,-35.446 2.692,-34.709
  rectangle: -2.692,-35.446 -2.057,-34.709
  rectangle: -1.742,-35.446 -1.107,-34.709
  rectangle: -0.792,-35.446 -0.157,-34.709
  rectangle: 0.157,-34.315 0.792,-33.909
  rectangle: 0.157,-35.446 0.792,-34.709
  rectangle: 1.107,-34.315 1.742,-33.909
  rectangle: 1.107,-35.446 1.742,-34.709
  rectangle: 2.057,-36.576 2.692,-35.839
  rectangle: -2.692,-36.576 -2.057,-35.839
  rectangle: -1.742,-36.576 -1.107,-35.839
  rectangle: -0.792,-36.576 -0.157,-35.839
  rectangle: 0.157,-36.576 0.792,-35.839
  rectangle: 1.107,-36.576 1.742,-35.839
  rectangle: -3.607,-35.865 -2.87,-33.96
  region: 3.607,-33.96 2.87,-33.96 2.87,-35.865 3.607,-35.865
Top Solder:
  region: 3.505,-32.131 2.413,-32.131 2.413,-33.172 3.505,-33.172
  rectangle: -3.505,-33.172 -2.413,-32.131
  rectangle: -2.692,-36.83 2.692,-33.782
  rectangle: -3.632,-35.941 3.632,-33.858
Mechanical 15:
  text "2.5400x4.8260cm" at -12.471,-39.395 h1.52
Drill Drawing:
  text ".Legend" at 19.736,-39.98 h1.52

## Text inside footprints (layer, text, board x,y; h text height)
U1: Mechanical 13 "CUTOUT POLYGON" at -6.501,10.349 h0.25; Mechanical 13 "ANTENNA AREA" at -6.501,10.857 h0.25